# EAGLE board watch (EAGLE 6.4)
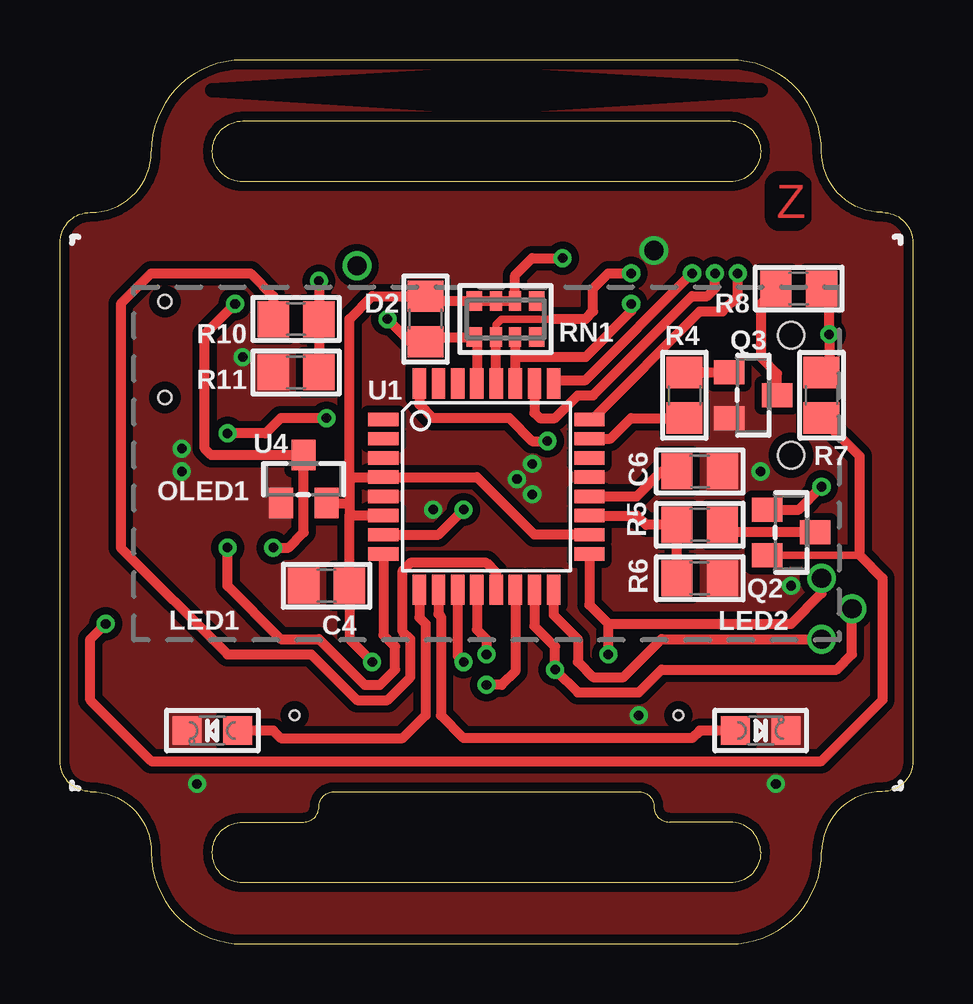
[diagram p0: board, top side]
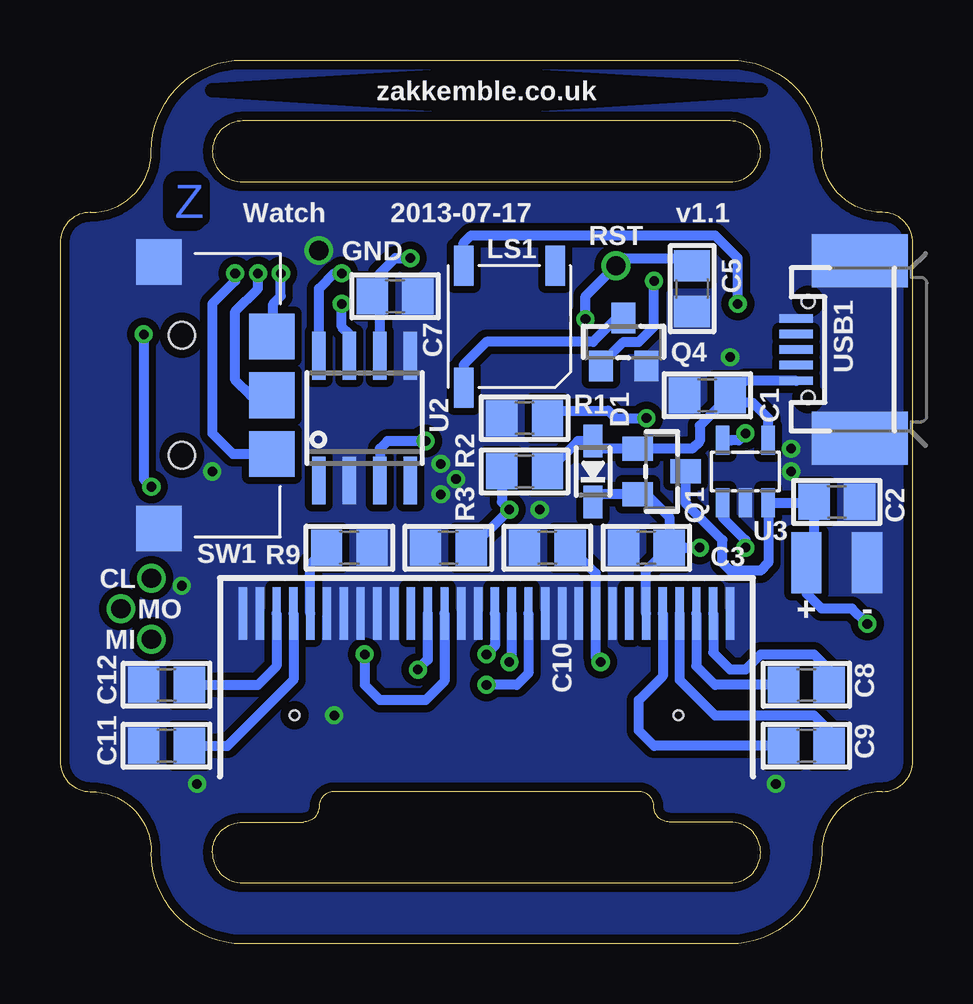
[diagram p1: board, bottom side, seen from below]

Size 35.56 x 36.83 mm. Coordinates in mm from the lower left corner, seen from the top.
Outline: 34.29,30.48 arc-90 35.56,29.21 35.56,7.62 arc-90 34.29,6.35 arc90 31.75,3.81 arc-90 27.94,0 7.62,0 arc-90 3.81,3.81 arc90 1.27,6.35 arc-90 0,7.62 0,29.21 arc-90 1.27,30.48 arc90 3.81,33.02 arc-90 7.62,36.83 27.94,36.83 arc-90 31.75,33.02 arc90 34.29,30.48
Outline: 7.62,2.54 arc-90 6.35,3.81 arc-90 7.62,5.08 10.16,5.08 arc90 10.79,5.71 arc-90 11.43,6.35 24.13,6.35 arc-90 24.76,5.71 arc90 25.4,5.08 27.94,5.08 arc-90 29.21,3.81 arc-90 27.94,2.54 7.62,2.54
Outline: 27.94,34.29 arc-90 29.21,33.02 arc-90 27.94,31.75 7.62,31.75 arc-90 6.35,33.02 arc-90 7.62,34.29 27.94,34.29
Copper layers (1*16): Top 0.0356mm / dielectric 1.5011mm / Bottom 0.0356mm
Design rules "LaenPCBOrder *": minimum track width 6mil, minimum drill 13mil, track to track 6mil, track to pad 6mil, pad to pad 6mil, via to via 6mil, smd to smd 6mil, copper to edge 15mil, drill to drill 6mil, minimum pad ring 7mil, minimum via ring 7mil, stop-mask expansion 4mil, vias tented up to drill 24mil, thermal gap 10mil
tRestrict: area 6.4,34.9 to 29.2,36.2; area 29.7,30 to 31,31.9
bRestrict: area 6.4,34.9 to 29.2,36.2; area 29.7,30 to 31,31.9

## Footprints (pad centres in the part's own frame; a part is rotated, then mirrored left to right if it is on the bottom)
0805 = smd 1.3 x 1.5: 1 -0.95,0; 2 0.95,0
SOD-323 = smd 1.35 x 0.8: A 1.27,0; C -1.27,0
DIODE0805 = smd 1.3 x 1.5: 1 -0.95,0; 2 0.95,0
CHIPLED_0805 = smd 1.2 x 1.2: A 0,-1.05; C 0,1.05
PIEZO = smd 1.676 x 0.813: 1 -2.54,-1.905; 2 2.54,-1.905; 3 -2.54,1.905
UG-2864HSWEG01_1.3_WRAPAROUND = smd 0.35 x 2.2 bottom: 1 -10.15,-0.2; 2 -9.45,-0.2; 3 -8.75,-0.2; 4 -8.05,-0.2; 5 -7.35,-0.2; 6 -6.65,-0.2; 7 -5.95,-0.2; 8 -5.25,-0.2; 9 -4.55,-0.2; 10 -3.85,-0.2; 11 -3.15,-0.2; 12 -2.45,-0.2; 13 -1.75,-0.2; 14 -1.05,-0.2; 15 -0.35,-0.2; 16 0.35,-0.2; 17 1.05,-0.2; 18 1.75,-0.2; 19 2.45,-0.2; 20 3.15,-0.2; 21 3.85,-0.2; 22 4.55,-0.2; 23 5.25,-0.2; 24 5.95,-0.2; 25 6.65,-0.2; 26 7.35,-0.2; 27 8.05,-0.2; 28 8.75,-0.2; 29 9.45,-0.2; 30 10.15,-0.2 | hole 0.4: -8,-4.45; 8,-4.45
SMD1,27-2,54 = smd 1.27 x 2.54: 1 0,0
SOT23-WIDE = smd 1 x 1.27: 1 -0.95,-1; 2 0.95,-1; 3 0,1
0805_NOTHERMALS = smd 1.3 x 1.5: 1 -0.95,0; 2 0.95,0
RESPACK_4X0603 = smd 0.65 x 0.8: 1 -1.3,-0.75; 4 1.3,-0.75; 5 1.3,0.75; 8 -1.3,0.75 | smd 0.5 x 0.8: 2 -0.4,-0.75; 3 0.4,-0.75; 6 0.4,0.75; 7 -0.4,0.75
MCPL3-AC-V = smd 1.9 x 1.9: 1 -2.45,-3.75; 2 2.45,-3.75; C 5.55,0.95; G -5.55,0.95; PUSH 0,-3.75 | hole 1.1: -2.5,0; 2.5,0
TQFP32-08 = smd 1.27 x 0.559: 1 -4.293,2.8; 2 -4.293,2; 3 -4.293,1.2; 4 -4.293,0.4; 5 -4.293,-0.4; 6 -4.293,-1.2; 7 -4.293,-2; 8 -4.293,-2.8; 17 4.293,-2.8; 18 4.293,-2; 19 4.293,-1.2; 20 4.293,-0.4; 21 4.293,0.4; 22 4.293,1.2; 23 4.293,2; 24 4.293,2.8 | smd 0.559 x 1.27: 9 -2.8,-4.293; 10 -2,-4.293; 11 -1.2,-4.293; 12 -0.4,-4.293; 13 0.4,-4.293; 14 1.2,-4.293; 15 2,-4.293; 16 2.8,-4.293; 25 2.8,4.293; 26 2,4.293; 27 1.2,4.293; 28 0.4,4.293; 29 -0.4,4.293; 30 -1.2,4.293; 31 -2,4.293; 32 -2.8,4.293
SOIC8_150MIL = smd 0.559 x 1.981: 1 -1.905,-2.6; 2 -0.635,-2.6; 3 0.635,-2.6; 4 1.905,-2.6; 5 1.905,2.6; 6 0.635,2.6; 7 -0.635,2.6; 8 -1.905,2.6
SOT23-5L = smd 0.55 x 1.2: 1 -0.95,-1.3; 2 0,-1.3; 3 0.95,-1.3; 4 0.95,1.3; 5 -0.95,1.3
SOT-23 = smd 1 x 1.27: 1 -0.95,-1; 2 0.95,-1; 3 0,1
USB-MICROB_LARGEPAD = smd 0.35 x 1.4: D+ 0,2.65; D- -0.65,2.65; GND 1.3,2.65; ID 0.65,2.65; VBUS -1.3,2.65 | smd 2.2 x 4: MT1 -3.7,0; MT2 3.7,0 | hole 0.55: -2,2.15; 2,2.15

## Placement (x,y rotation side)
C1  4u7  [0805]  8.57,22.86 180 bottom
C2  4u7  [0805]  3.17,18.41 0 bottom
C3  1u  [0805]  11.11,16.51 180 bottom
C4  100n  [0805]  11.11,14.92 180 top
C5  4n7  [0805]  9.21,27.3 270 bottom
C6  100n  [0805]  26.67,19.68 0 top
C7  100n  [0805]  21.59,26.99 0 bottom
C8  1u  [0805]  4.45,10.79 0 bottom
C9  1u  [0805]  4.45,8.26 0 bottom
C10  1u  [0805]  15.24,16.51 180 bottom
C11  4u7  [0805]  31.12,8.26 180 bottom
C12  2u2  [0805]  31.12,10.79 180 bottom
D1  ZLLS410  [SOD-323]  13.34,19.68 90 bottom
D2  TS4148 RY  [DIODE0805]  15.24,26.04 90 top
LED1  [CHIPLED_0805]  6.35,8.89 90 top
LED2  [CHIPLED_0805]  29.21,8.89 270 top
LS1  [PIEZO]  16.83,25.72 270 bottom
OLED1  [UG-2864HSWEG01_1.3_WRAPAROUND]  17.78,13.97 0 top
PAD1  [SMD1,27-2,54]  4.45,15.88 180 bottom
PAD2  [SMD1,27-2,54]  1.91,15.88 180 bottom
Q1  DMP1045U  [SOT23-WIDE]  10.48,19.68 270 bottom
Q2  DMP1045U  [SOT23-WIDE]  30.48,17.14 270 top
Q3  DMG6968U  [SOT23-WIDE]  28.89,22.86 270 top
Q4  DMG6968U  [SOT23-WIDE]  12.06,25.08 0 bottom
R1  22K  [0805]  16.19,21.91 0 bottom
R2  47K  [0805_NOTHERMALS]  16.19,19.68 0 bottom
R3  47K  [0805_NOTHERMALS]  19.37,16.51 0 bottom
R4  100R  [0805]  26.04,22.86 270 top
R5  7K5  [0805]  26.67,17.46 0 top
R6  2K7  [0805]  26.67,15.24 180 top
R7  10k  [0805]  31.75,22.86 90 top
R8  100R  [0805]  30.8,27.3 180 top
R9  390K  [0805]  23.49,16.51 180 bottom
R10  100R  [0805]  9.84,26.04 180 top
R11  47K  [0805]  9.84,23.81 180 top
RN1  10K  [RESPACK_4X0603]  18.57,26.04 0 top
SW1  MCPL3-AV-V  [MCPL3-AC-V]  30.48,22.86 90 bottom
U1  ATMEGA328P  [TQFP32-08]  17.78,19.05 0 top
U2  DS3231  [SOIC8_150MIL]  22.86,21.91 0 bottom
U3  MCP73832T-2ACI/OT  [SOT23-5L]  6.98,19.68 0 bottom
U4  XC6206P252MR  [SOT-23]  10.16,19.37 0 top
USB1  USB-MICROBLARGEPAD  [USB-MICROB_LARGEPAD]  2.22,24.77 90 bottom

## Library data of the parts
C1-C12 LED1 LED2 Q1-Q4 R1-R11 RN1 = microbuilder
D1 LS1 OLED1 SW1 U2 U4 USB1 = zak
D2 = diode0805
PAD1 PAD2 = wirepad
U1 = SparkFun-DigitalIC; PROD_ID: IC-09069
U3 = adafruit

## Nets
2.5V: C4.1 C7.1 C10.1 D2.2 OLED1.9 RN1.6 RN1.7 RN1.8 U1.4 U1.6 U1.18 U2.6 U4.2
5.0V: C3.1 D1.C LS1.1 OLED1.6 Q1.2 U4.3
BATT_EN: R4.2 U1.23
BATT_LVL: R5.1 R6.2 U1.19
DC: OLED1.15 U1.12
GND: C1.2 C2.2 C3.2 C4.2 C5.2 C6.2 C7.2 C10.2 C11.2 C12.2 LED1.C LED2.C OLED1.1 OLED1.8 OLED1.10 OLED1.11 OLED1.12 OLED1.16 OLED1.17 OLED1.21 OLED1.22 OLED1.23 OLED1.24 OLED1.25 OLED1.29 OLED1.30 PAD2.1 Q3.2 Q4.2 R1.1 R3.1 R6.1 R9.1 R11.2 SW1.C SW1.G U1.3 U1.5 U1.21 U2.2 U2.5 U3.2 U4.1 USB1.GND USB1.MT1 USB1.MT2
MISO: U1.16
MOSI: OLED1.19 U1.15
N$1: C6.1 U1.20
N$2: SW1.1 U1.24
N$3: C8.2 OLED1.2
N$4: SW1.2 U1.25
N$5: OLED1.26 R9.2
N$6: C1.1 D1.A Q1.1 R2.2 U3.4 USB1.VBUS
N$7: LS1.2 Q4.3
N$8: Q4.1 R10.1 R11.1
N$9: SW1.PUSH U1.26
N$10: R1.2 U3.5
N$11: LED1.A U1.9
N$12: Q2.1 R7.2 R8.1
N$13: C9.1 OLED1.5
N$14: C9.2 OLED1.4
N$15: C8.1 OLED1.3
N$16: LED2.A U1.10
N$17: Q3.3 R8.2
N$18: Q2.3 R5.2
N$19: C11.1 OLED1.27
N$20: C12.1 OLED1.28
N$21: Q3.1 R4.1
PIEZO: R10.2 U1.13
PWR_SENSE: R2.1 R3.2 U1.7
RES: OLED1.14 U1.11
RESET: C5.1 D2.1 RN1.1 U1.29
RTC_INT: U1.32 U2.3
SCK: OLED1.18 U1.17
SCL: RN1.2 U1.28 U2.8
SDA: RN1.3 U1.27 U2.7
SS_OLED: OLED1.13 U1.14
STAT: U1.8 U3.1
VBAT: C2.1 PAD1.1 Q1.3 Q2.2 R7.1 U3.3

## Tracks (layer width: path | path; a pad name or v marks a point on that pad's centre or on a via)
2.5V  (via drill 0.4)
  Top 0.406: U1.6 12.06,17.85 | 12.06,19.45 U1.4 17.38,19.45 19.78,17.05 U1.18 | v20.95,28.57 19.68,28.57 18.97,27.86 RN1.6 RN1.7 RN1.8 15.44,26.79 D2.2 13.02,26.99 12.06,26.04 12.06,19.45 | 12.06,18.41 12.06,17.85 | C4.1 12.06,17.85 | U4.2 12.02,18.37 12.06,18.41 | 12.06,19.45 12.06,18.41 | C4.1 | C4.1 12.06,12.7 v13.02,11.75
  Bottom 0.406: C10.1 13.23,15.45 OLED1.9 13.23,11.96 v13.02,11.75 | v20.95,28.57 21.59,28.57 22.23,27.94 22.23,27.62 22.54,27.31 C7.1 22.23,26.67 U2.6
5.0V  (via drill 0.4)
  Top 0.406: v8.89,16.51 9.52,16.51 10.16,17.14 U4.3 6.3,20.37 6.03,20.64 6.03,25.4 v7.3,26.67
  Bottom 0.406: OLED1.6 11.13,15.54 C3.1 | C3.1 10.16,17.78 11.11,18.73 Q1.2 13.02,18.73 D1.C | C3.1 9.53,16.51 v8.89,16.51 | LS1.1 18.73,29.21 18.41,29.53 8.25,29.53 7.3,28.57 v7.3,26.67
BATT_EN
  Top 0.406: U1.23 22.95,21.05 23.81,21.91 R4.2
BATT_LVL
  Top 0.406: R6.2 R5.1 24.45,17.46 24.06,17.85 U1.19
DC  (via drill 0.4)
  Top 0.406: U1.12 17.38,13.1 17.78,12.7 v17.78,12.06
  Bottom 0.406: OLED1.15 17.43,12.41 v17.78,12.06
GND  (via drill 0.4, 0.8)
  other vias: 19.68,20 5.71,6.67 29.84,6.67 29.21,19.68 30.48,14.92 5.08,20.64 24.76,28.89 15.56,18.1 5.08,19.68 19.68,18.73 19.05,19.37 24.13,9.53 7.62,24.45
  pour Bottom (isolate 0.305, no thermals): 0,36.83 35.56,36.83 35.56,0 0,0
  pour Top (isolate 0.305, no thermals): 0,36.83 35.56,36.83 35.56,0 0,0
MISO  (via drill 0.8)
  Top 0.406: U1.16 20.58,13.71 21.59,12.7 21.59,11.75 22.23,11.11 23.49,11.11 25.08,12.7 v31.75,12.7
MOSI  (via drill 0.4, 0.8)
  Top 0.406: U1.15 19.78,13.24 20.64,12.38 v20.64,11.43 21.59,10.48 24.13,10.48 25.08,11.43 32.38,11.43 33.02,12.06 v33.02,13.97
  Bottom 0.406: OLED1.19 20.23,11.84 v20.64,11.43
N$1
  Top 0.406: U1.20 24.05,18.65 25.08,19.68 C6.1
N$2  (via drill 0.4)
  Top 0.406: U1.24 22.17,21.85 26.67,26.35 27.62,26.35 28.26,26.99 v28.26,27.94
  Bottom 0.406: SW1.1 28.35,20.41 29.21,21.27 29.21,26.67 28.26,27.62 v28.26,27.94
N$3
  Bottom 0.406: OLED1.2 8.33,12.14 7.62,11.43 6.98,11.43 6.35,12.06 4.13,12.06 3.49,11.43 C8.2
N$4  (via drill 0.4)
  Top 0.406: U1.25 20.58,23.5 21.91,23.5 v26.35,27.94
  Bottom 0.406: SW1.2 26.67,25.37 26.67,26.67 26.35,26.99 v26.35,27.94
N$5
  Bottom 0.406: OLED1.26 25.13,15.82 R9.2
N$6
  Bottom 0.406: R2.2 13.97,20.95 D1.A 13.02,20.64 Q1.1 9.21,20.64 8.89,20.95 8.89,21.59 C1.1 | U3.4 6.03,21.91 6.67,22.54 7.3,22.54 C1.1 | USB1.VBUS 7.02,23.46 C1.1
N$7
  Bottom 0.406: LS1.2 18.73,24.13 17.78,25.08 13.34,25.08 12.34,26.08 Q4.3
N$8  (via drill 0.4)
  Top 0.406: R11.1 R10.1 v10.79,27.62
  Bottom 0.406: v10.79,27.62 10.79,25.72 11.43,25.08 12.06,25.08 13.02,24.13 Q4.1
N$9  (via drill 0.4)
  Top 0.406: U1.26 19.78,22.13 20,21.91 20.64,21.91 21.59,22.86 22.23,22.86 26.35,26.99 26.99,26.99 27.3,27.3 v27.3,27.94
  Bottom 0.406: 26.67,22.86 SW1.PUSH 27.62,22.86 28.26,23.5 28.26,26.35 27.3,27.3 v27.3,27.94
N$10  (via drill 0.4)
  Top 0.406: v11.11,21.91 9.21,21.91 8.57,21.27 v6.98,21.27
  Bottom 0.406: v11.11,21.91 12.38,21.91 12.7,22.23 14.92,22.23 R1.2 | 7.59,20.98 U3.5 7.27,20.98 v6.98,21.27
N$11
  Top 0.406: U1.9 14.98,13.6 15.24,13.34 15.24,9.53 14.29,8.57 9.21,8.57 8.89,8.89 LED1.A
N$12  (via drill 0.4)
  Top 0.406: Q2.1 30.79,18.09 v31.75,19.05 | R8.1 32.07,26.98 v32.07,25.4 32.07,24.13 R7.2
  Bottom 0.406: v32.07,25.4 32.07,19.37 v31.75,19.05
N$13
  Bottom 0.406: OLED1.5 10.43,11.16 11.43,10.16 11.43,8.89 10.79,8.26 C9.1
N$14
  Bottom 0.406: OLED1.4 9.73,11 8.25,9.53 4.13,9.53 3.49,8.89 C9.2
N$15
  Bottom 0.406: OLED1.3 9.03,11.57 8.25,10.79 C8.1
N$16
  Top 0.406: U1.10 15.78,13.75 15.88,13.65 15.88,9.53 16.83,8.57 26.35,8.57 26.67,8.89 LED2.A
N$17
  Top 0.406: Q3.3 29.89,23.77 29.21,24.45 29.21,26.67 R8.2
N$18
  Top 0.406: Q2.3 27.94,17.14 R5.2
N$19
  Bottom 0.406: C11.1 28.57,8.26 25.83,11 OLED1.27
N$20
  Bottom 0.406: C12.1 27.3,10.79 26.53,11.57 OLED1.28
N$21
  Top 0.406: R4.1 Q3.1
PIEZO
  Top 0.406: U1.13 18.18,15.47 17.78,15.88 14.6,15.88 14.29,15.56 14.29,13.02 14.6,12.7 14.6,11.11 13.65,10.16 12.38,10.16 10.48,12.06 6.98,12.06 2.54,16.51 2.54,26.67 3.81,27.94 7.94,27.94 8.89,26.99 R10.2
PWR_SENSE  (via drill 0.4)
  Top 0.406: v16.83,18.1 15.78,17.05 U1.7
  Bottom 0.406: R2.1 17.14,18.41 v16.83,18.1 R3.2
RES  (via drill 0.4)
  Top 0.406: U1.11 16.58,11.99 v16.83,11.75
  Bottom 0.406: OLED1.14 16.73,11.85 v16.83,11.75
RESET  (via drill 0.4, 0.8)
  Top 0.406: U1.29 17.38,25.29 RN1.1 15.44,25.29 D2.1 14.6,25.09 v13.65,26.04
  Bottom 0.406: v13.65,26.04 13.65,26.99 v12.38,28.26 12.06,28.57 9.53,28.57 C5.1
RTC_INT  (via drill 0.4)
  Top 0.406: U1.32 14.98,22.48 15.56,21.91 18.73,21.91 19.68,20.95 v20.32,20.95
  Bottom 0.406: v20.32,20.95 21.91,20.95 22.23,20.64 U2.3
SCK  (via drill 0.4, 0.8)
  Top 0.406: U1.17 22.07,14.12 22.86,13.34 | v22.86,12.06 22.86,13.34 | 22.86,13.34 30.48,13.34 31.75,14.61 v31.75,15.24
  Bottom 0.406: OLED1.18 19.53,10.95 20.32,10.16 22.23,10.16 22.86,10.79 v22.86,12.06
SCL  (via drill 0.4)
  Top 0.305: RN1.2 18.17,25.79 18.41,26.04 20.64,26.04
  Top 0.406: U1.28 RN1.2 | 20.64,26.04 21.91,26.04 22.23,26.35 22.23,27.3 22.86,27.94 v23.81,27.94
  Bottom 0.406: U2.8 24.76,27.3 24.13,27.94 v23.81,27.94
SDA  (via drill 0.4)
  Top 0.406: RN1.3 18.98,24.45 | U1.27 18.98,24.45 | 18.98,24.45 21.91,24.45 23.81,26.35 v23.81,26.67
  Bottom 0.406: U2.7 23.49,25.4 23.81,25.72 v23.81,26.67
SS_OLED  (via drill 0.4)
  Top 0.406: U1.14 18.98,11.36 18.41,10.79 v17.78,10.79
  Bottom 0.406: OLED1.13 16.03,11.28 16.51,10.79 v17.78,10.79
STAT  (via drill 0.4)
  Top 0.406: v6.98,16.51 6.98,14.92 9.21,12.7 10.79,12.7 12.7,10.79 13.34,10.79 13.97,11.43 13.97,12.38 13.49,12.87 U1.8
  Bottom 0.406: v6.98,16.51 6.98,16.83 7.94,17.78 U3.1
VBAT  (via drill 0.4)
  Top 0.305: Q2.2 33.34,16.2
  Top 0.406: R7.1 33.34,20.32 33.34,16.2 34.29,15.24 34.29,10.16 31.75,7.62 3.81,7.62 1.27,10.16 1.27,12.7 v1.91,13.34
  Bottom 0.406: v1.91,13.34 2.54,13.97 3.81,13.97 4.45,14.61 PAD1.1 4.12,16.2 C2.1 4.16,18.39 U3.3 6.03,15.87 6.35,15.56 7.62,15.56 7.94,15.88 7.94,16.83 9.48,18.37 Q1.3

## Text on the board
Top: Z
Bottom: Z
bPlace: zakkemble.co.uk | v1.1 | RST | 2013-07-17 | Watch | GND | CL | - | + | MO | MI